# EAGLE board axiom_beta_main_board_v0.27_test-default.8f82e889 (EAGLE 7.7.0), part 1 of 3
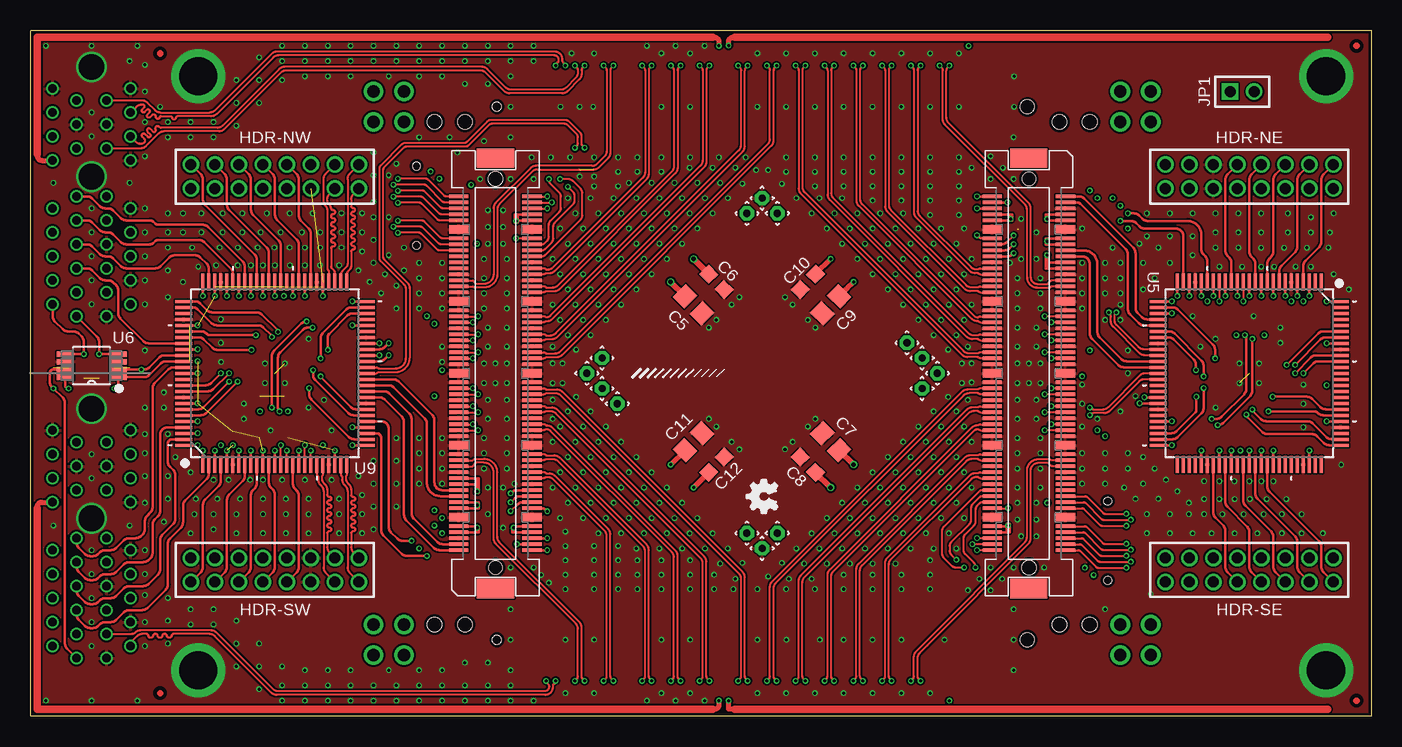
[diagram p0: board, top side]
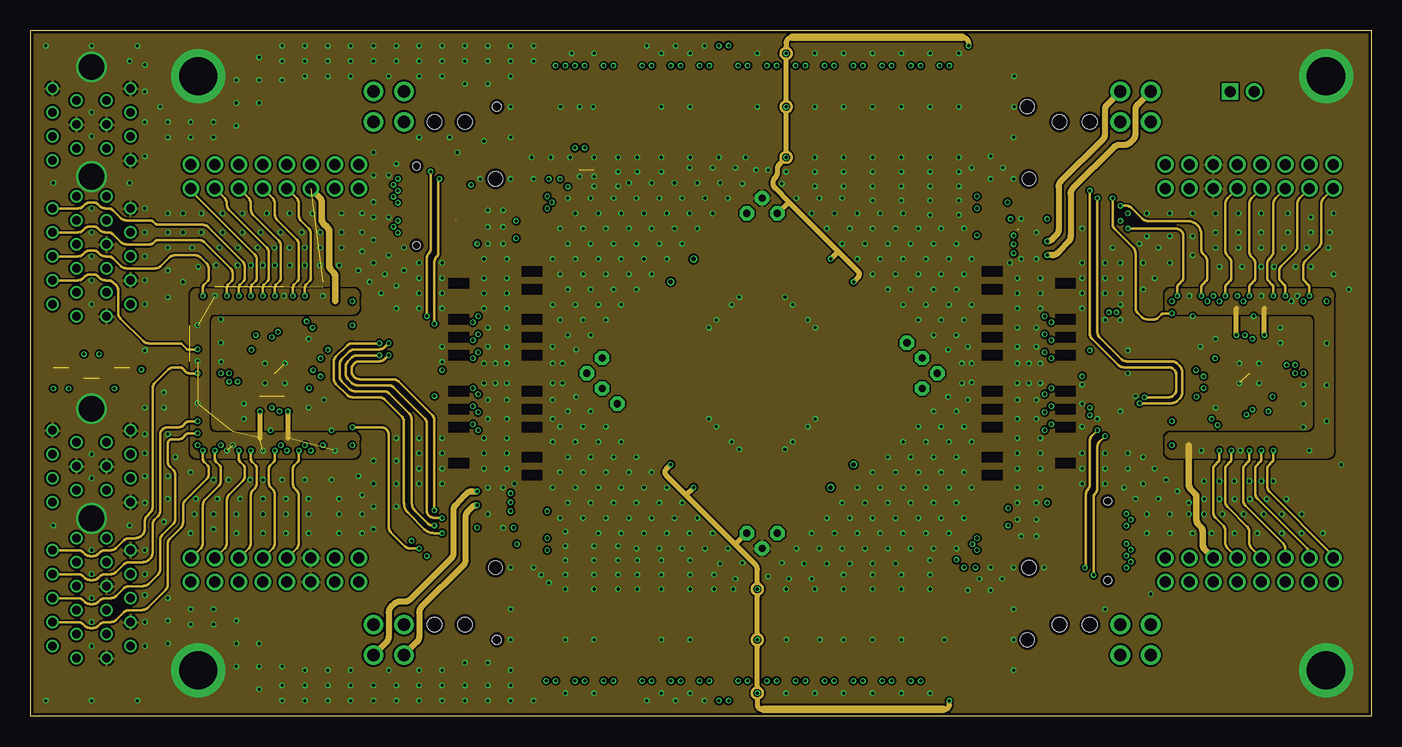
[diagram p1: board, inner layer Route2]
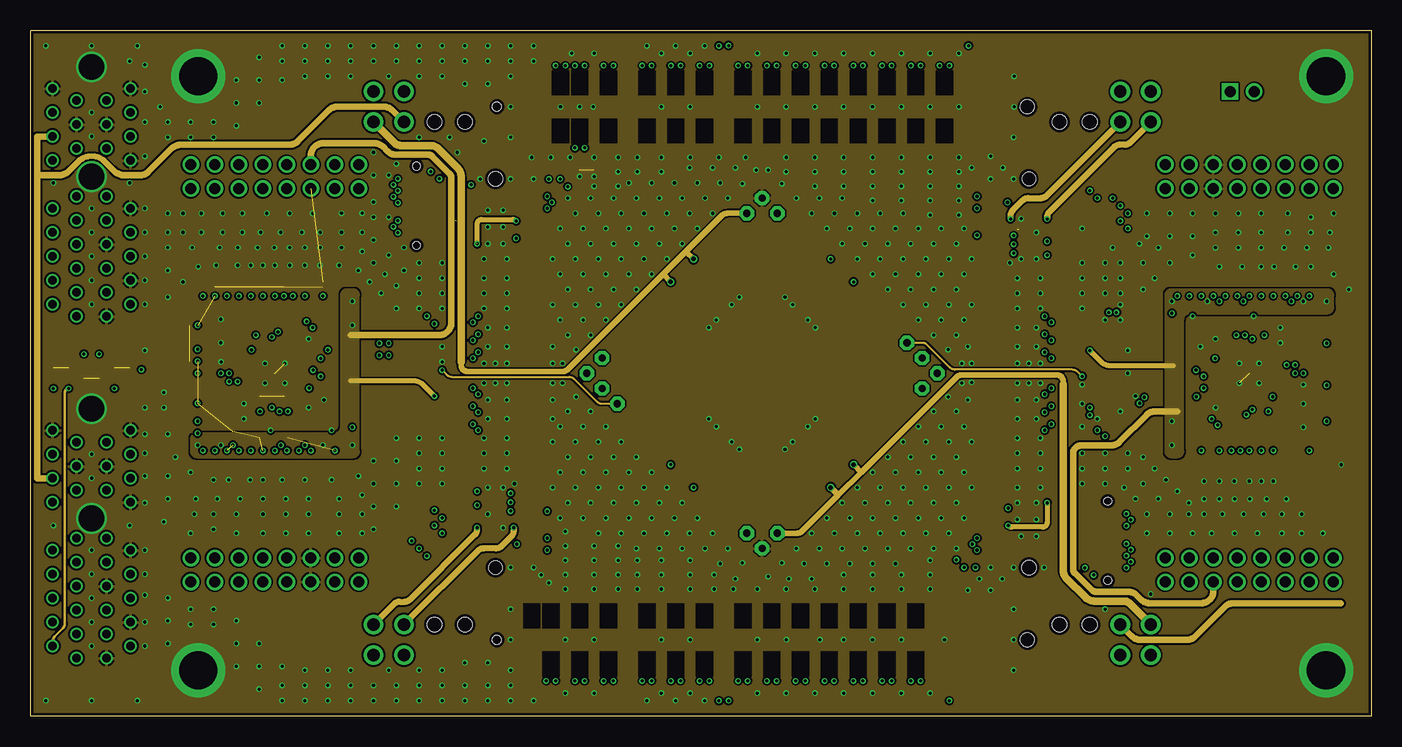
[diagram p2: board, inner layer Route15]
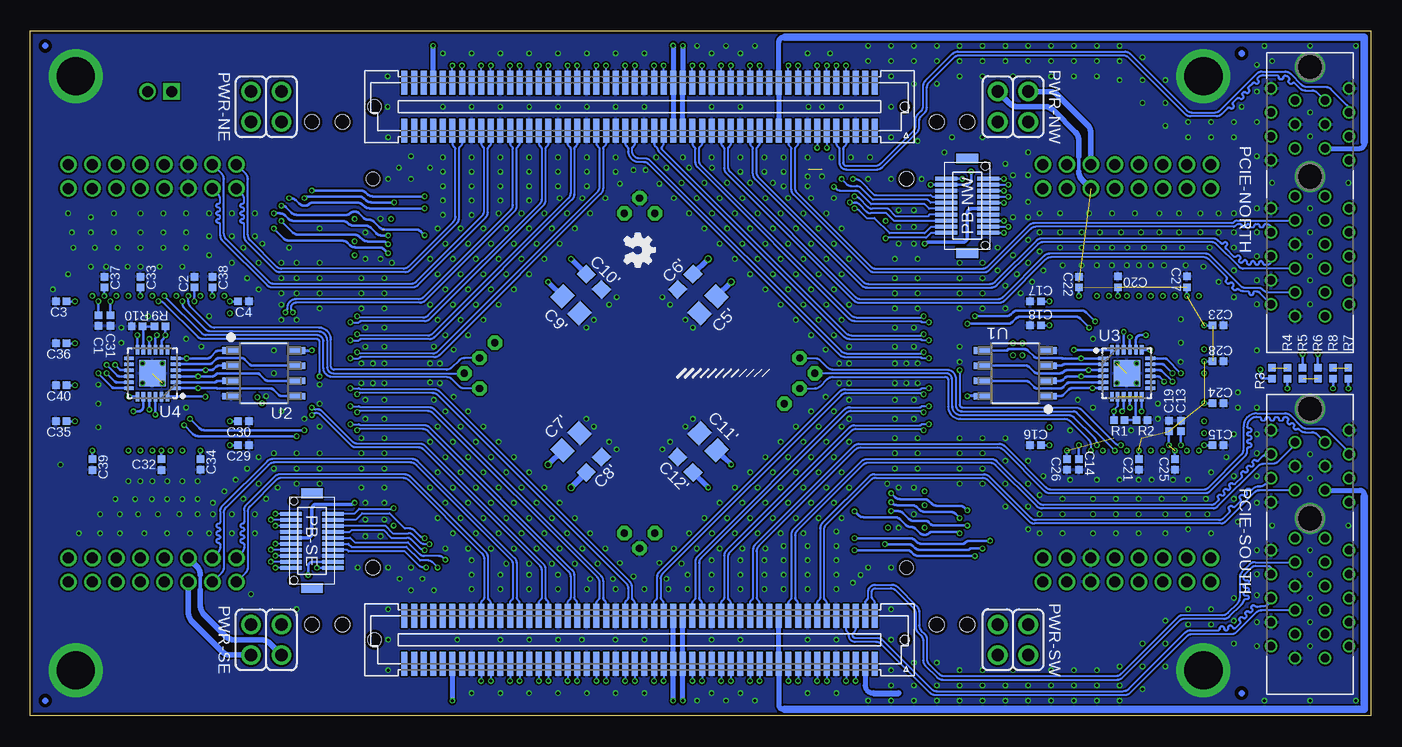
[diagram p3: board, bottom side, seen from below]

Size 111.76 x 57.15 mm. Coordinates in mm from the lower left corner, seen from the top.
Outline: 111.76,57.15 0,57.15 0,0 111.76,0 111.76,57.15
Copper layers (1*2*15*16): Top 0.035559375mm / dielectric 0.17018125mm / Route2 0.01778125mm / dielectric 47mil / Route15 0.01778125mm / dielectric 0.17018125mm / Bottom 0.035559375mm
Design rules "OSHPark-4layer-tuned *": minimum track width 5mil, minimum drill 10mil, track to track 6mil, track to pad 5mil, pad to pad 5mil, via to via 5mil, smd to smd 5mil, copper to edge 10mil, drill to drill 6mil, minimum pad ring 4mil, minimum via ring 4mil, stop-mask expansion 2mil, vias tented up to drill 100mil, thermal gap 6mil
Net classes: 0 default: width 0.152 mm, drill 0.254 mm; 1 power: width 0.152 mm, drill 0.254 mm
Holes 1.2 mm at 33.66,49.53 36.2,49.53 85.72,49.53 88.27,49.53 33.66,7.62 36.2,7.62 85.72,7.62 88.27,7.62
tKeepout: area 105.5,50.8 to 110.5,55.8; area 105.5,1.3 to 110.5,6.3; area 11.5,1.3 to 16.5,6.3; area 11.5,50.8 to 16.5,55.8; area 44.8,12.4 to 77.1,44.7
bKeepout: area 105.5,50.8 to 110.5,55.8; area 105.5,1.3 to 110.5,6.3; area 11.5,1.3 to 16.5,6.3; area 11.5,50.8 to 16.5,55.8
tRestrict: area 10.2,1.3 to 11.4,2.5; area 10.2,54.7 to 11.4,55.8; area 109.9,0.7 to 111,1.8; area 109.9,55.3 to 111,56.4
bRestrict: area 10.2,1.3 to 11.4,2.5; area 10.2,54.7 to 11.4,55.8; area 109.9,0.7 to 111,1.8; area 109.9,55.3 to 111,56.4

## Footprints (pad centres in the part's own frame; a part is rotated, then mirrored left to right if it is on the bottom)
0402-B = smd 0.62 x 0.62: 1 -0.45,0; 2 0.45,0
0805-A = smd 1.35 x 1.55: 1 -1,0; 2 1,0
0603-A = smd 1.15 x 1.1: 1 -0.9,0; 2 0.9,0
2X08M = drill 0.914: 1 -7,-1; 2 -7,1; 3 -5,-1; 4 -5,1; 5 -3,-1; 6 -3,1; 7 -1,-1; 8 -1,1; 9 1,-1; 10 1,1; 11 3,-1; 12 3,1; 13 5,-1; 14 5,1; 15 7,-1; 16 7,1
1X02M = drill 0.914 square: 1 -1,0 | drill 0.914: 2 1,0
DF12(XX)-20DP-0.5V = smd 1.8 x 0.35: 1 -1.75,2.25; 2 1.75,2.25; 3 -1.75,1.75; 4 1.75,1.75; 5 -1.75,1.25; 6 1.75,1.25; 7 -1.75,0.75; 8 1.75,0.75; 9 -1.75,0.25; 10 1.75,0.25; 11 -1.75,-0.25; 12 1.75,-0.25; 13 -1.75,-0.75; 14 1.75,-0.75; 15 -1.75,-1.25; 16 1.75,-1.25; 17 -1.75,-1.75; 18 1.75,-1.75; 19 -1.75,-2.25; 20 1.75,-2.25 | smd 1.8 x 0.8: M1 0,3.95; M2 0,-3.95 | hole 0.625: 1.5,-3.3; 1.5,3.3
PCIE-36-NOPEG = drill 0.7: A1 -11.65,1.25; A2 -10.65,3.25; A3 -9.65,1.25; A4 -8.65,3.25; A5 -7.65,1.25; A6 -6.65,3.25; A7 -5.65,1.25; A8 -4.65,3.25; A9 -3.65,1.25; A10 -2.65,3.25; A11 -1.65,1.25; A12 1.35,3.25; A13 2.35,1.25; A14 3.35,3.25; A15 4.35,1.25; A16 5.35,3.25; A17 6.35,1.25; A18 7.35,3.25; B1 -11.65,-1.25; B2 -10.65,-3.25; B3 -9.65,-1.25; B4 -8.65,-3.25; B5 -7.65,-1.25; B6 -6.65,-3.25; B7 -5.65,-1.25; B8 -4.65,-3.25; B9 -3.65,-1.25; B10 -2.65,-3.25; B11 -1.65,-1.25; B12 1.35,-3.25; B13 2.35,-1.25; B14 3.35,-3.25; B15 4.35,-1.25; B16 5.35,-3.25; B17 6.35,-1.25; B18 7.35,-3.25
2X02 = drill 1.016 pad 1.651: 1 -1.27,-1.27; 2 -1.27,1.27; 3 1.27,-1.27; 4 1.27,1.27
SOIC127P600X175-8N = smd 1.473 x 0.559: 1 -2.718,1.905; 2 -2.718,0.635; 3 -2.718,-0.635; 4 -2.718,-1.905; 5 2.718,-1.905; 6 2.718,-0.635; 7 2.718,0.635; 8 2.718,1.905
QFN50P400X400X80-25N = smd 0.813 x 0.305: 1 -1.956,1.245; 2 -1.956,0.762; 3 -1.956,0.254; 4 -1.956,-0.254; 5 -1.956,-0.762; 6 -1.956,-1.245; 13 1.956,-1.245; 14 1.956,-0.762; 15 1.956,-0.254; 16 1.956,0.254; 17 1.956,0.762; 18 1.956,1.245 | smd 0.305 x 0.813: 7 -1.245,-1.956; 8 -0.762,-1.956; 9 -0.254,-1.956; 10 0.254,-1.956; 11 0.762,-1.956; 12 1.245,-1.956; 19 1.245,1.956; 20 0.762,1.956; 21 0.254,1.956; 22 -0.254,1.956; 23 -0.762,1.956; 24 -1.245,1.956 | smd 2.21 x 2.21: 25 0,0
MACHXO2-100TQFP = smd 1.4 x 0.25: 1 -7.6,6; 2 -7.6,5.5; 3 -7.6,5; 4 -7.6,4.5; 5 -7.6,4; 6 -7.6,3.5; 7 -7.6,3; 8 -7.6,2.5; 9 -7.6,2; 10 -7.6,1.5; 11 -7.6,1; 12 -7.6,0.5; 13 -7.6,0; 14 -7.6,-0.5; 15 -7.6,-1; 16 -7.6,-1.5; 17 -7.6,-2; 18 -7.6,-2.5; 19 -7.6,-3; 20 -7.6,-3.5; 21 -7.6,-4; 22 -7.6,-4.5; 23 -7.6,-5; 24 -7.6,-5.5; 25 -7.6,-6; 51 7.6,-6; 52 7.6,-5.5; 53 7.6,-5; 54 7.6,-4.5; 55 7.6,-4; 56 7.6,-3.5; 57 7.6,-3; 58 7.6,-2.5; 59 7.6,-2; 60 7.6,-1.5; 61 7.6,-1; 62 7.6,-0.5; 63 7.6,0; 64 7.6,0.5; 65 7.6,1; 66 7.6,1.5; 67 7.6,2; 68 7.6,2.5; 69 7.6,3; 70 7.6,3.5; 71 7.6,4; 72 7.6,4.5; 73 7.6,5; 74 7.6,5.5; 75 7.6,6 | smd 0.25 x 1.4: 26 -6,-7.6; 27 -5.5,-7.6; 28 -5,-7.6; 29 -4.5,-7.6; 30 -4,-7.6; 31 -3.5,-7.6; 32 -3,-7.6; 33 -2.5,-7.6; 34 -2,-7.6; 35 -1.5,-7.6; 36 -1,-7.6; 37 -0.5,-7.6; 38 0,-7.6; 39 0.5,-7.6; 40 1,-7.6; 41 1.5,-7.6; 42 2,-7.6; 43 2.5,-7.6; 44 3,-7.6; 45 3.5,-7.6; 46 4,-7.6; 47 4.5,-7.6; 48 5,-7.6; 49 5.5,-7.6; 50 6,-7.6; 76 6,7.6; 77 5.5,7.6; 78 5,7.6; 79 4.5,7.6; 80 4,7.6; 81 3.5,7.6; 82 3,7.6; 83 2.5,7.6; 84 2,7.6; 85 1.5,7.6; 86 1,7.6; 87 0.5,7.6; 88 0,7.6; 89 -0.5,7.6; 90 -1,7.6; 91 -1.5,7.6; 92 -2,7.6; 93 -2.5,7.6; 94 -3,7.6; 95 -3.5,7.6; 96 -4,7.6; 97 -4.5,7.6; 98 -5,7.6; 99 -5.5,7.6; 100 -6,7.6
SOP65P490X110-8N = smd 1.422 x 0.457: 1 -2.21,0.965; 2 -2.21,0.33; 3 -2.21,-0.33; 4 -2.21,-0.965; 5 2.21,-0.965; 6 2.21,-0.33; 7 2.21,0.33; 8 2.21,0.965
1.2/0.6 = drill 0.6 pad 1.2 octagon: 1 0,0
FX10A-100S/10 = smd 0.3 x 1.6: 1 -14.75,3.05; 2 -14.75,-3.05; 3 -14.25,3.05; 4 -14.25,-3.05; 5 -13.75,3.05; 6 -13.75,-3.05; 7 -13.25,3.05; 8 -13.25,-3.05; 9 -12.75,3.05; 10 -12.75,-3.05; 11 -11.25,3.05; 12 -11.25,-3.05; 13 -10.75,3.05; 14 -10.75,-3.05; 15 -10.25,3.05; 16 -10.25,-3.05; 17 -9.75,3.05; 18 -9.75,-3.05; 19 -9.25,3.05; 20 -9.25,-3.05; 21 -8.75,3.05; 22 -8.75,-3.05; 23 -8.25,3.05; 24 -8.25,-3.05; 25 -7.75,3.05; 26 -7.75,-3.05; 27 -7.25,3.05; 28 -7.25,-3.05; 29 -6.75,3.05; 30 -6.75,-3.05; 31 -5.25,3.05; 32 -5.25,-3.05; 33 -4.75,3.05; 34 -4.75,-3.05; 35 -4.25,3.05; 36 -4.25,-3.05; 37 -3.75,3.05; 38 -3.75,-3.05; 39 -3.25,3.05; 40 -3.25,-3.05; 41 -2.75,3.05; 42 -2.75,-3.05; 43 -2.25,3.05; 44 -2.25,-3.05; 45 -1.75,3.05; 46 -1.75,-3.05; 47 -1.25,3.05; 48 -1.25,-3.05; 49 -0.75,3.05; 50 -0.75,-3.05; 51 0.75,3.05; 52 0.75,-3.05; 53 1.25,3.05; 54 1.25,-3.05; 55 1.75,3.05; 56 1.75,-3.05; 57 2.25,3.05; 58 2.25,-3.05; 59 2.75,3.05; 60 2.75,-3.05; 61 3.25,3.05; 62 3.25,-3.05; 63 3.75,3.05; 64 3.75,-3.05; 65 4.25,3.05; 66 4.25,-3.05; 67 4.75,3.05; 68 4.75,-3.05; 69 5.25,3.05; 70 5.25,-3.05; 71 6.75,3.05; 72 6.75,-3.05; 73 7.25,3.05; 74 7.25,-3.05; 75 7.75,3.05; 76 7.75,-3.05; 77 8.25,3.05; 78 8.25,-3.05; 79 8.75,3.05; 80 8.75,-3.05; 81 9.25,3.05; 82 9.25,-3.05; 83 9.75,3.05; 84 9.75,-3.05; 85 10.25,3.05; 86 10.25,-3.05; 87 10.75,3.05; 88 10.75,-3.05; 89 11.25,3.05; 90 11.25,-3.05; 91 12.75,3.05; 92 12.75,-3.05; 93 13.25,3.05; 94 13.25,-3.05; 95 13.75,3.05; 96 13.75,-3.05; 97 14.25,3.05; 98 14.25,-3.05; 99 14.75,3.05; 100 14.75,-3.05 | smd 0.7 x 1.6: G1 -12,3.05; G2 -12,-3.05; G3 -6,3.05; G4 -6,-3.05; G5 0,3.05; G6 0,-3.05; G7 6,3.05; G8 6,-3.05; G9 12,3.05; G10 12,-3.05 | smd 1.6 x 3.1: M1 -17.95,0; M2 17.95,0 | hole 1.1: -16.2,0 | hole 1.2: 16.2,0
µZ-NOHOLES-R = smd 0.5 x 2: 1 19.6,-24.226; 2 19.6,-20.226; 3 18.8,-24.226; 4 18.8,-20.226; 5 18,-24.226; 6 18,-20.226; 7 17.2,-24.226; 8 17.2,-20.226; 9 16.4,-24.226; 10 16.4,-20.226; 11 15.6,-24.226; 12 15.6,-20.226; 13 14.8,-24.226; 14 14.8,-20.226; 15 14,-24.226; 16 14,-20.226; 17 13.2,-24.226; 18 13.2,-20.226; 19 12.4,-24.226; 20 12.4,-20.226; 21 11.6,-24.226; 22 11.6,-20.226; 23 10.8,-24.226; 24 10.8,-20.226; 25 10,-24.226; 26 10,-20.226; 27 9.2,-24.226; 28 9.2,-20.226; 29 8.4,-24.226; 30 8.4,-20.226; 31 7.6,-24.226; 32 7.6,-20.226; 33 6.8,-24.226; 34 6.8,-20.226; 35 6,-24.226; 36 6,-20.226; 37 5.2,-24.226; 38 5.2,-20.226; 39 4.4,-24.226; 40 4.4,-20.226; 41 3.6,-24.226; 42 3.6,-20.226; 43 2.8,-24.226; 44 2.8,-20.226; 45 2,-24.226; 46 2,-20.226; 47 1.2,-24.226; 48 1.2,-20.226; 49 0.4,-24.226; 50 0.4,-20.226; 51 -0.4,-24.226; 52 -0.4,-20.226; 53 -1.2,-24.226; 54 -1.2,-20.226; 55 -2,-24.226; 56 -2,-20.226; 57 -2.8,-24.226; 58 -2.8,-20.226; 59 -3.6,-24.226; 60 -3.6,-20.226; 61 -4.4,-24.226; 62 -4.4,-20.226; 63 -5.2,-24.226; 64 -5.2,-20.226; 65 -6,-24.226; 66 -6,-20.226; 67 -6.8,-24.226; 68 -6.8,-20.226; 69 -7.6,-24.226; 70 -7.6,-20.226; 71 -8.4,-24.226; 72 -8.4,-20.226; 73 -9.2,-24.226; 74 -9.2,-20.226; 75 -10,-24.226; 76 -10,-20.226; 77 -10.8,-24.226; 78 -10.8,-20.226; 79 -11.6,-24.226; 80 -11.6,-20.226; 81 -12.4,-24.226; 82 -12.4,-20.226; 83 -13.2,-24.226; 84 -13.2,-20.226; 85 -14,-24.226; 86 -14,-20.226; 87 -14.8,-24.226; 88 -14.8,-20.226; 89 -15.6,-24.226; 90 -15.6,-20.226; 91 -16.4,-24.226; 92 -16.4,-20.226; 93 -17.2,-24.226; 94 -17.2,-20.226; 95 -18,-24.226; 96 -18,-20.226; 97 -18.8,-24.226; 98 -18.8,-20.226; 99 -19.6,-24.226; 100 -19.6,-20.226; 101 19.6,20.226; 102 19.6,24.226; 103 18.8,20.226; 104 18.8,24.226; 105 18,20.226; 106 18,24.226; 107 17.2,20.226; 108 17.2,24.226; 109 16.4,20.226; 110 16.4,24.226; 111 15.6,20.226; 112 15.6,24.226; 113 14.8,20.226; 114 14.8,24.226; 115 14,20.226; 116 14,24.226; 117 13.2,20.226; 118 13.2,24.226; 119 12.4,20.226; 120 12.4,24.226; 121 11.6,20.226; 122 11.6,24.226; 123 10.8,20.226; 124 10.8,24.226; 125 10,20.226; 126 10,24.226; 127 9.2,20.226; 128 9.2,24.226; 129 8.4,20.226; 130 8.4,24.226; 131 7.6,20.226; 132 7.6,24.226; 133 6.8,20.226; 134 6.8,24.226; 135 6,20.226; 136 6,24.226; 137 5.2,20.226; 138 5.2,24.226; 139 4.4,20.226; 140 4.4,24.226; 141 3.6,20.226; 142 3.6,24.226; 143 2.8,20.226; 144 2.8,24.226; 145 2,20.226; 146 2,24.226; 147 1.2,20.226; 148 1.2,24.226; 149 0.4,20.226; 150 0.4,24.226; 151 -0.4,20.226; 152 -0.4,24.226; 153 -1.2,20.226; 154 -1.2,24.226; 155 -2,20.226; 156 -2,24.226; 157 -2.8,20.226; 158 -2.8,24.226; 159 -3.6,20.226; 160 -3.6,24.226; 161 -4.4,20.226; 162 -4.4,24.226; 163 -5.2,20.226; 164 -5.2,24.226; 165 -6,20.226; 166 -6,24.226; 167 -6.8,20.226; 168 -6.8,24.226; 169 -7.6,20.226; 170 -7.6,24.226; 171 -8.4,20.226; 172 -8.4,24.226; 173 -9.2,20.226; 174 -9.2,24.226; 175 -10,20.226; 176 -10,24.226; 177 -10.8,20.226; 178 -10.8,24.226; 179 -11.6,20.226; 180 -11.6,24.226; 181 -12.4,20.226; 182 -12.4,24.226; 183 -13.2,20.226; 184 -13.2,24.226; 185 -14,20.226; 186 -14,24.226; 187 -14.8,20.226; 188 -14.8,24.226; 189 -15.6,20.226; 190 -15.6,24.226; 191 -16.4,20.226; 192 -16.4,24.226; 193 -17.2,20.226; 194 -17.2,24.226; 195 -18,20.226; 196 -18,24.226; 197 -18.8,20.226; 198 -18.8,24.226; 199 -19.6,20.226; 200 -19.6,24.226 | hole 1.125: 22.1,-22.225; 22.1,22.225 | hole 0.725: -22.1,-22.225; -22.1,22.225

## Placement (x,y rotation side)
C1  100n  [0402-B]  106.06,32.98 270 bottom
C2  100n  [0402-B]  98.06,36.17 90 bottom
C3  10n  [0402-B]  109.16,34.58 180 bottom
C4  10n  [0402-B]  93.96,34.58 0 bottom
C5  [0805-A]  55.25,34.29 315 top
C5'  [0805-A]  55.25,34.29 225 bottom
C6  [0603-A]  57.15,36.2 315 top
C6'  [0603-A]  57.15,36.2 225 bottom
C7  [0805-A]  66.67,22.86 135 top
C7'  [0805-A]  66.67,22.86 45 bottom
C8  [0603-A]  64.77,20.95 135 top
C8'  [0603-A]  64.77,20.95 45 bottom
C9  [0805-A]  66.67,34.29 225 top
C9'  [0805-A]  66.67,34.29 315 bottom
C10  [0603-A]  64.77,36.2 225 top
C10'  [0603-A]  64.77,36.2 315 bottom
C11  [0805-A]  55.25,22.86 45 top
C11'  [0805-A]  55.25,22.86 135 bottom
C12  [0603-A]  57.15,20.95 45 top
C12'  [0603-A]  57.15,20.95 135 bottom
C13  100n  [0402-B]  15.86,24.17 90 bottom
C14  100n  [0402-B]  24.36,20.98 270 bottom
C15  10n  [0402-B]  12.76,22.57 0 bottom
C16  10n  [0402-B]  27.96,22.57 180 bottom
C17  10n  [0402-B]  27.96,34.58 180 bottom
C18  10n  [0402-B]  27.96,32.58 180 bottom
C19  100n  [0402-B]  16.86,24.17 90 bottom
C20  100n  [0402-B]  21.11,36.2 90 bottom
C21  10n  [0402-B]  19.36,20.98 270 bottom
C22  10n  [0402-B]  24.36,36.18 90 bottom
C23  10n  [0402-B]  12.76,32.58 0 bottom
C24  10n  [0402-B]  12.76,26.07 0 bottom
C25  10n  [0402-B]  16.36,20.98 270 bottom
C26  10n  [0402-B]  25.36,20.98 270 bottom
C27  10n  [0402-B]  15.36,36.2 90 bottom
C28  100n  [0402-B]  12.76,29.57 0 bottom
C29  10n  [0402-B]  93.96,22.57 0 bottom
C30  10n  [0402-B]  93.96,24.57 0 bottom
C31  100n  [0402-B]  105.06,32.98 270 bottom
C32  100n  [0402-B]  100.81,20.95 270 bottom
C33  10n  [0402-B]  102.56,36.17 90 bottom
C34  10n  [0402-B]  97.56,20.97 270 bottom
C35  10n  [0402-B]  109.16,24.57 180 bottom
C36  10n  [0402-B]  109.16,31.07 180 bottom
C37  10n  [0402-B]  105.56,36.17 90 bottom
C38  10n  [0402-B]  96.56,36.17 90 bottom
C39  10n  [0402-B]  106.56,20.95 270 bottom
C40  100n  [0402-B]  109.16,27.57 180 bottom
HDR-NE  [2X08M]  101.56,44.97 180 top
HDR-NW  [2X08M]  20.36,44.97 0 top
HDR-SE  [2X08M]  101.56,12.18 180 top
HDR-SW  [2X08M]  20.36,12.18 0 top
JP1  [1X02M]  100.97,52.07 0 top
LOGO1  OSHW_LOGO_FILLX0100-NT  [OSHW_FILLX100_NOTEXT]  62.23,16.89 90 top
LOGO2  OSHW_LOGO_FILLX0100-NT  [OSHW_FILLX100_NOTEXT]  62.23,40.26 270 bottom
PB-NW  DF12(XX)-20DP-0.5V  [DF12(XX)-20DP-0.5V]  33.66,42.55 0 bottom
PB-SE  DF12(XX)-20DP-0.5V  [DF12(XX)-20DP-0.5V]  88.27,14.6 180 bottom
PCIE-NORTH  PCIE-36-AXIOM-NOPEG  [PCIE-36-NOPEG]  5.08,44.97 90 bottom
PCIE-SOUTH  PCIE-36-AXIOM-NOPEG  [PCIE-36-NOPEG]  5.08,16.48 90 bottom
PWR-NE  PINHD-2X02_2.54  [2X02]  92.08,50.8 180 bottom
PWR-NW  PINHD-2X02_2.54  [2X02]  29.85,50.8 0 bottom
PWR-SE  PINHD-2X02_2.54  [2X02]  92.08,6.35 180 bottom
PWR-SW  PINHD-2X02_2.54  [2X02]  29.85,6.35 0 bottom
R1  [0402-B]  20.99,24.66 0 bottom
R2  [0402-B]  19.09,24.66 0 bottom
R3  [0402-B]  8.26,28.57 270 bottom
R4  [0402-B]  6.98,28.57 270 bottom
R5  [0402-B]  5.72,28.57 90 bottom
R6  [0402-B]  4.45,28.57 90 bottom
R7  [0402-B]  1.91,28.57 270 bottom
R8  [0402-B]  3.18,28.57 270 bottom
R9  [0402-B]  100.93,32.49 180 bottom
R10  [0402-B]  102.83,32.49 180 bottom
U1  SST25VF020B  [SOIC127P600X175-8N]  29.65,28.57 180 bottom
U2  SST25VF020B  [SOIC127P600X175-8N]  92.27,28.57 0 bottom
U3  [QFN50P400X400X80-25N]  20.36,28.57 0 bottom
U4  [QFN50P400X400X80-25N]  101.56,28.57 180 bottom
U5  MACHXO2-100  [MACHXO2-100TQFP]  101.56,28.57 270 top
U6  PCA9540BDP  [SOP65P490X110-8N]  5.08,29.21 180 top
U9  MACHXO2-100  [MACHXO2-100TQFP]  20.36,28.57 90 top
U$1  PINPAD1.27MM  [1.2/0.6]  46.36,28.57 45 top
U$2  PINPAD1.27MM  [1.2/0.6]  47.62,27.3 45 top
U$3  PINPAD1.27MM  [1.2/0.6]  73.03,31.11 45 top
U$4  PINPAD1.27MM  [1.2/0.6]  48.9,26.04 225 top
U$11  PINPAD1.27MM  [1.2/0.6]  47.62,29.84 45 top
U$14  PINPAD1.27MM  [1.2/0.6]  75.56,28.57 45 top
U$15  PINPAD1.27MM  [1.2/0.6]  74.3,29.84 45 top
U$16  PINPAD1.27MM  [1.2/0.6]  74.3,27.3 45 top
U$17  PINPAD1.27MM  [1.2/0.6]  60.96,43.18 45 top
U$18  PINPAD1.27MM  [1.2/0.6]  59.69,41.91 45 top
U$19  PINPAD1.27MM  [1.2/0.6]  62.23,41.91 45 top
U$20  PINPAD1.27MM  [1.2/0.6]  60.96,13.97 45 top
U$21  PINPAD1.27MM  [1.2/0.6]  62.23,15.24 45 top
U$22  PINPAD1.27MM  [1.2/0.6]  59.69,15.24 45 top
X-EAST  FX10-100/10S  [FX10A-100S/10]  83.19,28.57 270 top
X-WEST  FX10-100/10S  [FX10A-100S/10]  38.73,28.57 90 top
ZED1  µZ-FCI-NOHOLES-R  [µZ-NOHOLES-R]  60.96,28.57 180 bottom

## Library data of the parts
C1-C5 C5' C6 C6' C7 C7' C8 C8' C9 C9' C10 C10' C11 C11' C12 C12' C13-C40 R1-R10 = generic-rcl
HDR-NE HDR-NW HDR-SE HDR-SW PWR-NE PWR-NW PWR-SE PWR-SW = pincon
JP1 = pinhead-2
LOGO1 LOGO2 = ohw-logo
PB-NW PB-SE = df12
PCIE-NORTH PCIE-SOUTH = PCIe
U1 U2 = flash
U3 U4 = microchip-exp
U5 U9 = machxo2
U6 = pca9540; MPN: PCA9540BDP; OC_FARNELL: 2212116; OC_NEWARK: 55W4318; PACKAGE: TSSOP8; SUPPLIER: NXP
U$1-U$4 U$11 U$14-U$22 = pinpad
X-EAST X-WEST = fx10
ZED1 = microzed

## Nets
!HOLD!_E: U2.7 U4.5
!HOLD!_W: U1.7 U3.5
!WP!_E: U2.3 U4.2
!WP!_W: U1.3 U3.2
A_SCL: PB-NW.1 U3.9
A_SDA: PB-NW.3 U3.10
B_SCL: PB-SE.1 U4.9
B_SDA: PB-SE.3 U4.10
BANK13_00_N [power]: PCIE-NORTH.A14 ZED1.89
BANK13_00_P [power]: PCIE-NORTH.A13 ZED1.87
BANK13_01_N [power]: U9.38 ZED1.90
BANK13_01_P [power]: U9.39 ZED1.88
BANK13_02_N [power]: PCIE-NORTH.A16 ZED1.93
BANK13_02_P [power]: PCIE-NORTH.A17 ZED1.91
BANK13_03_N [power]: PCIE-NORTH.B16 ZED1.94
BANK13_03_P [power]: PCIE-NORTH.B17 ZED1.92
BANK13_04_N [power]: PCIE-SOUTH.A6 ZED1.195
BANK13_04_P [power]: PCIE-SOUTH.A5 ZED1.193
BANK13_05_N: PCIE-SOUTH.A3 ZED1.196
BANK13_05_P: PCIE-SOUTH.A2 ZED1.194
BANK13_06_N [power]: PCIE-SOUTH.A8 ZED1.199
BANK13_06_P [power]: PCIE-SOUTH.A9 ZED1.197
C_CK_E: U5.18 U$14.1
C_CK_W: U9.18 U$1.1
C_EN_E: U5.14 U$3.1
C_EN_W: U9.14 U$4.1
C_SI_E: U5.19 U$15.1
C_SI_W: U9.19 U$2.1
C_SO_E: U5.15 U$16.1
C_SO_W: U9.15 U$11.1
CSO_N_V [power]: C9'.1 C9.1 C10'.1 C10.1 U$19.1 ZED1.7
CSO_S_V [power]: C11'.1 C11.1 C12'.1 C12.1 U$22.1 ZED1.112
DONE_E: U4.22 U5.76
DONE_W: U3.22 U9.76
E_EN: U5.20 X-EAST.14
E_I2C_V: PWR-NE.1 X-EAST.11 X-EAST.13
E_SCK: U5.21 X-EAST.12
E_SCL: U5.36 X-EAST.15
E_SDA: U5.37 X-EAST.17
E_SDI: U5.24 X-EAST.16
E_SDO: U5.25 X-EAST.18
E_SPI_V: PWR-NE.3 X-EAST.19 X-EAST.21
E_VE_CV: PB-SE.19 X-EAST.90
E_VE_OV: PB-SE.8 X-EAST.93
E_VE_UV: PB-SE.10 X-EAST.91
GND: C1.2 C2.2 C3.2 C4.2 C5'.2 C5.2 C6'.2 C6.2 C7'.2 C7.2 C8'.2 C8.2 C9'.2 C9.2 C10'.2 C10.2 C11'.2 C11.2 C12'.2 C12.2 C13.2 C14.2 C15.2 C16.2 C17.2 C18.2 C19.2 C20.2 C21.2 C22.2 C23.2 C24.2 C25.2 C26.2 C27.2 C28.2 C29.2 C30.2 C31.2 C32.2 C33.2 C34.2 C35.2 C36.2 C37.2 C38.2 C39.2 C40.2 HDR-NE.11 HDR-NE.12 HDR-SW.11 HDR-SW.12 PB-NW.5 PB-NW.14 PB-SE.5 PB-SE.14 PCIE-NORTH.A1 PCIE-NORTH.A4 PCIE-NORTH.A7 PCIE-NORTH.A10 PCIE-NORTH.A12 PCIE-NORTH.A15 PCIE-NORTH.A18 PCIE-NORTH.B15 PCIE-NORTH.B18 PCIE-SOUTH.A1 PCIE-SOUTH.A4 PCIE-SOUTH.A7 PCIE-SOUTH.A10 PCIE-SOUTH.A12 PCIE-SOUTH.A15 PCIE-SOUTH.A18 PCIE-SOUTH.B15 PCIE-SOUTH.B18 R2.2 R10.2 U1.4 U2.4 U3.23 U3.25 U4.23 U4.25 U5.6 U5.22 U5.33 U5.44 U5.56 U5.72 U5.79 U5.92 U6.6 U9.6 U9.22 U9.33 U9.44 U9.56 U9.72 U9.79 U9.92 U$17.1 U$20.1 X-EAST.5 X-EAST.20 X-EAST.23 X-EAST.26 X-EAST.29 X-EAST.31 X-EAST.32 X-EAST.37 X-EAST.38 X-EAST.43 X-EAST.44 X-EAST.49 X-EAST.50 X-EAST.51 X-EAST.52 X-EAST.57 X-EAST.58 X-EAST.63 X-EAST.64 X-EAST.69 X-EAST.70 X-EAST.71 X-EAST.76 X-EAST.77 X-EAST.82 X-EAST.G1 X-EAST.G2 X-EAST.G3 X-EAST.G4 X-EAST.G5 X-EAST.G6 X-EAST.G7 X-EAST.G8 X-EAST.G9 X-EAST.G10 X-WEST.5 X-WEST.20 X-WEST.23 X-WEST.26 X-WEST.29 X-WEST.31 X-WEST.32 X-WEST.37 X-WEST.38 X-WEST.43 X-WEST.44 X-WEST.49 X-WEST.50 X-WEST.51 X-WEST.52 X-WEST.57 X-WEST.58 X-WEST.63 X-WEST.64 X-WEST.69 X-WEST.70 X-WEST.71 X-WEST.76 X-WEST.77 X-WEST.82 X-WEST.G1 X-WEST.G2 X-WEST.G3 X-WEST.G4 X-WEST.G5 X-WEST.G6 X-WEST.G7 X-WEST.G8 X-WEST.G9 X-WEST.G10 ZED1.15 ZED1.16 ZED1.21 ZED1.22 ZED1.27 ZED1.28 ZED1.33 ZED1.34 ZED1.39 ZED1.40 ZED1.45 ZED1.46 ZED1.51 ZED1.52 ZED1.65 ZED1.66 ZED1.71 ZED1.72 ZED1.77 ZED1.85 ZED1.86 ZED1.95 ZED1.96 ZED1.115 ZED1.116 ZED1.121 ZED1.122 ZED1.127 ZED1.128 ZED1.133 ZED1.134 ZED1.139 ZED1.140 ZED1.145 ZED1.146 ZED1.151 ZED1.152 ZED1.165 ZED1.166 ZED1.171 ZED1.172 ZED1.177 ZED1.185 ZED1.186 ZED1.191 ZED1.192
INITN_E: U4.21 U5.77
INITN_W: U3.21 U9.77
IO0: U5.84
IO1: U5.83
IO2: U5.75
IO3: U5.74
IO4: U5.71
IO5: U5.70
IO6: U5.69
IO7: U5.68
IO_SCL: U5.86
IO_SDA: U5.85
JTAG_V: PWR-SW.3 X-WEST.19 X-WEST.21
JTAGENB_E: U4.19 U5.82
JTAGENB_W: U3.19 U9.82
JX1_00_N [power]: X-EAST.27 ZED1.13
JX1_00_P [power]: X-EAST.25 ZED1.11
JX1_01_N [power]: HDR-NE.16 ZED1.14
JX1_01_P [power]: HDR-NE.15 ZED1.12
JX1_02_N [power]: X-EAST.24 ZED1.19
JX1_02_P [power]: X-EAST.22 ZED1.17
JX1_03_N [power]: HDR-NE.14 ZED1.20
JX1_03_P [power]: HDR-NE.13 ZED1.18
JX1_04_N [power]: X-EAST.30 ZED1.25
JX1_04_P [power]: X-EAST.28 ZED1.23
JX1_05_N: U5.35 ZED1.26
JX1_05_P: U5.34 ZED1.24
JX1_06_N [power]: X-EAST.36 ZED1.31
JX1_06_P [power]: X-EAST.34 ZED1.29
JX1_07_N [power]: X-EAST.35 ZED1.32
JX1_07_P [power]: X-EAST.33 ZED1.30
JX1_08_N: X-EAST.42 ZED1.37
JX1_08_P: X-EAST.40 ZED1.35
JX1_09_N [power]: X-EAST.41 ZED1.38
JX1_09_P [power]: X-EAST.39 ZED1.36
JX1_10_N [power]: X-EAST.48 ZED1.43
JX1_10_P [power]: X-EAST.46 ZED1.41
JX1_11_N [power]: X-EAST.47 ZED1.44
JX1_11_P [power]: X-EAST.45 ZED1.42
JX1_12_N [power]: X-WEST.56 ZED1.49
JX1_12_P [power]: X-WEST.54 ZED1.47
JX1_13_N [power]: X-WEST.55 ZED1.50
JX1_13_P [power]: X-WEST.53 ZED1.48
JX1_14_N [power]: X-WEST.62 ZED1.55
JX1_14_P [power]: X-WEST.60 ZED1.53
JX1_15_N: X-WEST.61 ZED1.56
JX1_15_P: X-WEST.59 ZED1.54
JX1_16_N [power]: X-WEST.68 ZED1.63
JX1_16_P [power]: X-WEST.66 ZED1.61
JX1_17_N [power]: X-WEST.67 ZED1.64
JX1_17_P [power]: X-WEST.65 ZED1.62
JX1_18_N [power]: X-WEST.74 ZED1.69
JX1_18_P [power]: X-WEST.72 ZED1.67
JX1_19_N [power]: PCIE-NORTH.A3 ZED1.70
JX1_19_P [power]: PCIE-NORTH.A2 ZED1.68
JX1_20_N: X-WEST.80 ZED1.75
JX1_20_P: X-WEST.78 ZED1.73
JX1_21_N: PCIE-NORTH.A6 ZED1.76
JX1_21_P: PCIE-NORTH.A5 ZED1.74
JX1_22_N: X-WEST.75 ZED1.83
JX1_22_P: X-WEST.73 ZED1.81
JX1_23_N [power]: PCIE-NORTH.A9 ZED1.84
JX1_23_P [power]: PCIE-NORTH.A8 ZED1.82
JX2_00_N [power]: HDR-SE.15 ZED1.119
JX2_00_P [power]: HDR-SE.16 ZED1.117
JX2_01_N [power]: X-EAST.73 ZED1.120
JX2_01_P [power]: X-EAST.75 ZED1.118
JX2_02_N [power]: HDR-SE.13 ZED1.125
JX2_02_P [power]: HDR-SE.14 ZED1.123
JX2_03_N [power]: X-EAST.78 ZED1.126
JX2_03_P [power]: X-EAST.80 ZED1.124
JX2_04_N [power]: U5.38 ZED1.131
JX2_04_P [power]: U5.39 ZED1.129
JX2_05_N [power]: X-EAST.72 ZED1.132
JX2_05_P [power]: X-EAST.74 ZED1.130
JX2_06_N [power]: X-EAST.65 ZED1.137
JX2_06_P [power]: X-EAST.67 ZED1.135
JX2_07_N [power]: X-EAST.66 ZED1.138
JX2_07_P [power]: X-EAST.68 ZED1.136
JX2_08_N [power]: X-EAST.59 ZED1.143
JX2_08_P [power]: X-EAST.61 ZED1.141
JX2_09_N [power]: X-EAST.60 ZED1.144
JX2_09_P [power]: X-EAST.62 ZED1.142
JX2_10_N [power]: X-EAST.53 ZED1.149
JX2_10_P [power]: X-EAST.55 ZED1.147
JX2_11_N [power]: X-EAST.54 ZED1.150
JX2_11_P [power]: X-EAST.56 ZED1.148
JX2_12_N [power]: X-WEST.45 ZED1.155
JX2_12_P [power]: X-WEST.47 ZED1.153
JX2_13_N [power]: X-WEST.46 ZED1.156
JX2_13_P [power]: X-WEST.48 ZED1.154
JX2_14_N: X-WEST.39 ZED1.163
JX2_14_P: X-WEST.41 ZED1.161
JX2_15_N [power]: X-WEST.40 ZED1.164
JX2_15_P [power]: X-WEST.42 ZED1.162
JX2_16_N [power]: X-WEST.33 ZED1.169
JX2_16_P [power]: X-WEST.35 ZED1.167
JX2_17_N [power]: X-WEST.34 ZED1.170
JX2_17_P [power]: X-WEST.36 ZED1.168
JX2_18_N [power]: PCIE-SOUTH.B17 ZED1.175
JX2_18_P [power]: PCIE-SOUTH.B16 ZED1.173
JX2_19_N [power]: X-WEST.28 ZED1.176
JX2_19_P [power]: X-WEST.30 ZED1.174
JX2_20_N [power]: PCIE-SOUTH.A17 ZED1.183
JX2_20_P [power]: PCIE-SOUTH.A16 ZED1.181
JX2_21_N [power]: X-WEST.22 ZED1.184
JX2_21_P [power]: X-WEST.24 ZED1.182
JX2_22_N: PCIE-SOUTH.A13 ZED1.189
JX2_22_P: PCIE-SOUTH.A14 ZED1.187
JX2_23_N [power]: X-WEST.25 ZED1.190
JX2_23_P [power]: X-WEST.27 ZED1.188
M_V_NW: C5'.1 C5.1 C6'.1 C6.1 PWR-NW.3 U$18.1
M_V_SE: C7'.1 C7.1 C8'.1 C8.1 PWR-SE.3 U$21.1
N$1: ZED1.9
N$6: X-EAST.79
N$7: X-EAST.81
N$9: U9.47
N$11: X-EAST.83
N$46: ZED1.10
N$47: ZED1.113
N$48: ZED1.114
N$49: ZED1.200
N$50: ZED1.97
N$51: ZED1.99
N$52: ZED1.98
N$53: ZED1.100
N$54: X-WEST.79
N$61: X-WEST.81
N$86: X-WEST.83
N$87: PB-NW.9 X-WEST.84
N$88: PB-NW.11 X-WEST.86
N$97: PB-NW.7 X-WEST.88
N$98: PB-SE.9 X-EAST.84
N$99: PB-SE.11 X-EAST.86
N$100: PB-SE.7 X-EAST.88
N$107: R9.2 R10.1 U4.11
N$115: PWR-SE.1
N$116: U5.47
N$117: U9.45
N$166: U5.45
N$177: R3.1 R4.1
N$178: R5.1 R6.1
N$179: R7.1 R8.1
N$180: U6.3
N$196: U3.7
N$200: R1.2 R2.1 U3.11
N$209: PCIE-SOUTH.A11
N$212: PCIE-NORTH.B3
N$245: PCIE-SOUTH.B3
N$256: PCIE-NORTH.A11
N_CHK_V: PB-NW.12 X-WEST.92 X-WEST.94
N_I2C_V: PWR-NE.4 X-EAST.7 X-EAST.9
N_SCK: U5.42 X-EAST.2
N_SCL: U5.29 X-EAST.1
N_SDA: U5.30 X-EAST.3
N_SDI: U5.28 X-EAST.6
N_SDO: U5.43 X-EAST.4
N_SPI_V: PWR-NE.2 X-EAST.8 X-EAST.10
N_VE_CV: PB-NW.13 X-WEST.100
N_VE_OV: PB-NW.2 X-WEST.99
N_VE_UV: PB-NW.16 X-WEST.89
N_VN_CV: PB-NW.15 X-WEST.98
N_VN_OV: PB-NW.4 X-WEST.97
N_VN_UV: PB-NW.18 X-WEST.87
N_VW_CV: PB-NW.17 X-WEST.96
N_VW_OV: PB-NW.6 X-WEST.95
N_VW_UV: PB-NW.20 X-WEST.85
PCIE_N_5V: PCIE-NORTH.B12 ZED1.59 ZED1.60
PCIE_N_IO0: PCIE-NORTH.B4 U9.84
PCIE_N_IO1: PCIE-NORTH.B5 U9.83
PCIE_N_IO2: PCIE-NORTH.B6 U9.75
PCIE_N_IO3: PCIE-NORTH.B7 U9.74
PCIE_N_IO4: PCIE-NORTH.B8 U9.71
PCIE_N_IO5: PCIE-NORTH.B9 U9.70
PCIE_N_IO6: PCIE-NORTH.B10 U9.69
PCIE_N_IO7: PCIE-NORTH.B11 U9.68
PCIE_N_SCL: PCIE-NORTH.B2 R6.2 U6.5
PCIE_N_SDA: PCIE-NORTH.B1 R5.2 U6.4
PCIE_N_V: PCIE-NORTH.B13 ZED1.79 ZED1.80
PCIE_S_5V: PCIE-SOUTH.B12 ZED1.159 ZED1.160
PCIE_S_IO0: PCIE-SOUTH.B4 U9.1
PCIE_S_IO1: PCIE-SOUTH.B5 U9.2
PCIE_S_IO2: PCIE-SOUTH.B6 U9.98
PCIE_S_IO3: PCIE-SOUTH.B7 U9.99
PCIE_S_IO4: PCIE-SOUTH.B8 U9.96
PCIE_S_IO5: PCIE-SOUTH.B9 U9.97
PCIE_S_IO6: PCIE-SOUTH.B10 U9.88
PCIE_S_IO7: PCIE-SOUTH.B11 U9.87
PCIE_S_SCL: PCIE-SOUTH.B2 R8.2 U6.8
PCIE_S_SDA: PCIE-SOUTH.B1 R7.2 U6.7
PCIE_S_V: PCIE-SOUTH.B13 ZED1.179 ZED1.180
PCIE_SCL: R4.2 U6.1 U9.86
PCIE_SDA: R3.2 U6.2 U9.85
PCIE_VCCIO: PCIE-NORTH.B14 PCIE-SOUTH.B14 PWR-NW.1
PEX_N_V [power]: ZED1.57 ZED1.58
PEX_S_V [power]: ZED1.157 ZED1.158
PROGRAMN_E: U4.20 U5.81
PROGRAMN_W: U3.20 U9.81
S_CHK_V: PB-SE.12 X-EAST.92 X-EAST.94
S_I2C_V: PWR-SW.4 X-WEST.7 X-WEST.9
S_IO0: U5.1
S_IO1: U5.2
S_IO2: U5.98
S_IO3: U5.99
S_IO4: U5.96
S_IO5: U5.97
S_IO6: U5.88
S_IO7: U5.87
S_SCK: U9.28 X-WEST.2
S_SCL: U9.34 X-WEST.1
S_SDA: U9.35 X-WEST.3
S_SDI: U9.30 X-WEST.6
S_SDO: U9.29 X-WEST.4
S_SPI_V: PWR-SW.2 X-WEST.8 X-WEST.10
S_VE_CV: PB-SE.17 X-EAST.96
S_VE_OV: PB-SE.6 X-EAST.95
S_VE_UV: PB-SE.20 X-EAST.85
S_VS_CV: PB-SE.15 X-EAST.98
S_VS_OV: PB-SE.4 X-EAST.97
S_VS_UV: PB-SE.18 X-EAST.87
S_VW_CV: PB-SE.13 X-EAST.100
S_VW_OV: PB-SE.2 X-EAST.99
S_VW_UV: PB-SE.16 X-EAST.89
SCK_E: U2.6 U4.3 U5.31
SCK_W: U1.6 U3.3 U9.31
SDI_E: U2.5 U4.1 U5.49
SDI_W: U1.5 U3.1 U9.49
SDO_E: U2.2 U4.4 U5.32
SDO_W: U1.2 U3.4 U9.32
SH_NE_IO0: HDR-NE.1 U5.4
SH_NE_IO1: HDR-NE.2 U5.3
SH_NE_IO2: HDR-NE.3 U5.8
SH_NE_IO3: HDR-NE.4 U5.7
SH_NE_IO4: HDR-NE.5 U5.10
SH_NE_IO5: HDR-NE.6 U5.9
SH_NE_IO6: HDR-NE.7 U5.12
SH_NE_IO7: HDR-NE.8 U5.13
SH_NE_IO8: HDR-NE.9 U5.16
SH_NE_IO9: HDR-NE.10 U5.17
SH_NW_IO0: HDR-NW.1 U9.67
SH_NW_IO1: HDR-NW.2 U9.66
SH_NW_IO2: HDR-NW.3 U9.65
SH_NW_IO3: HDR-NW.4 U9.64
SH_NW_IO4: HDR-NW.5 U9.63
SH_NW_IO5: HDR-NW.6 U9.62
SH_NW_IO6: HDR-NW.7 U9.60
SH_NW_IO7: HDR-NW.8 U9.59
SH_NW_IO8: HDR-NW.9 U9.58
SH_NW_IO9: HDR-NW.10 U9.57
SH_NW_V1: C13.1 C14.1 C15.1 C16.1 C17.1 C18.1 HDR-NW.12 PWR-NW.4 U1.8 U9.26 U9.46 U9.50 U9.100
SH_NW_V2: C19.1 C20.1 C21.1 C22.1 C23.1 C24.1 C25.1 C26.1 C27.1 C28.1 HDR-NW.11 PWR-NW.2 R1.1 U3.8 U3.12 U9.5 U9.11 U9.23 U9.55 U9.73 U9.80 U9.93
SH_SE_IO0: HDR-SE.1 U5.67
SH_SE_IO1: HDR-SE.2 U5.66
SH_SE_IO2: HDR-SE.3 U5.65
SH_SE_IO3: HDR-SE.4 U5.64
SH_SE_IO4: HDR-SE.5 U5.63
SH_SE_IO5: HDR-SE.6 U5.62
SH_SE_IO6: HDR-SE.7 U5.60
SH_SE_IO7: HDR-SE.8 U5.59
SH_SE_IO8: HDR-SE.9 U5.58
SH_SE_IO9: HDR-SE.10 U5.57
SH_SE_V1: C1.1 C2.1 C3.1 C4.1 C29.1 C30.1 HDR-SE.12 PWR-SE.4 U2.8 U5.26 U5.46 U5.50 U5.100
SH_SE_V2: C31.1 C32.1 C33.1 C34.1 C35.1 C36.1 C37.1 C38.1 C39.1 C40.1 HDR-SE.11 PWR-SE.2 R9.1 U4.8 U4.12 U5.5 U5.11 U5.23 U5.55 U5.73 U5.80 U5.93
SH_SW_IO0: HDR-SW.1 U9.4
SH_SW_IO1: HDR-SW.2 U9.3
SH_SW_IO2: HDR-SW.3 U9.8
SH_SW_IO3: HDR-SW.4 U9.7
SH_SW_IO4: HDR-SW.5 U9.10
SH_SW_IO5: HDR-SW.6 U9.9
SH_SW_IO6: HDR-SW.7 U9.12
SH_SW_IO7: HDR-SW.8 U9.13
SH_SW_IO8: HDR-SW.9 U9.16
SH_SW_IO9: HDR-SW.10 U9.17
SN_E: U4.24 U5.48
SN_W: U3.24 U9.48
SS_E: U2.1 U4.6 U5.27
SS_W: U1.1 U3.6 U9.27
TCK: U9.43 X-WEST.12
TCK_E: U4.17 U5.91
TCK_W: U3.17 U9.91
TDI: U9.41 X-WEST.16
TDI_E: U4.16 U5.94
TDI_W: U3.16 U9.94
TDO: U9.40 X-WEST.18
TDO_E: U4.15 U5.95
TDO_W: U3.15 U9.95
TMS: U9.42 X-WEST.14
TMS_E: U4.18 U5.90
TMS_W: U3.18 U9.90
VCCO_13 [power]: ZED1.198
VCCO_34: ZED1.78
VCCO_35: ZED1.178
W_I2C_V: PWR-SW.1 X-WEST.11 X-WEST.13
W_SCL: U9.36 X-WEST.15
W_SDA: U9.37 X-WEST.17
W_VW_CV: PB-NW.19 X-WEST.90
W_VW_OV: PB-NW.8 X-WEST.93
W_VW_UV: PB-NW.10 X-WEST.91
XX1_N: HDR-NW.16 U9.52
XX1_P: HDR-NW.15 U9.51
XX2_N: HDR-NW.14 U9.54
XX2_P: HDR-NW.13 U9.53
XX3_N: HDR-SW.16 U9.25
XX3_P: HDR-SW.15 U9.24
XX4_N: HDR-SW.14 U9.21
XX4_P: HDR-SW.13 U9.20
XY1_N: U5.52
XY1_P: U5.51
XY2_N: U5.54
XY2_P: U5.53

## Tracks (layer width: path | path; a pad name or v marks a point on that pad's centre or on a via)
!HOLD!_E
  Bottom 0.203: U2.7 93.19,29.21 arc45 93.46,29.32 93.87,29.73 arc-45 94.14,29.84 96,29.84 arc-45 96.27,29.73 96.56,29.45 arc45 96.83,29.34 U4.5
!HOLD!_W
  Bottom 0.203: U1.7 28.77,27.94 arc45 28.5,27.83 28.09,27.42 arc-45 27.82,27.3 25.91,27.3 arc-45 25.65,27.42 25.36,27.7 arc45 25.09,27.81 U3.5
!WP!_E
  Bottom 0.203: U2.3 96.09,27.94 arc-45 96.22,27.89 arc45 96.4,27.81 U4.2
!WP!_W
  Bottom 0.203: U1.3 25.83,29.21 arc-45 25.7,29.26 arc45 25.52,29.34 U3.2
A_SCL  (via drill 0.25)
  Top 0.203: v23.49,32.38 23.12,32.38 arc45 22.67,32.2 20.8,30.32 arc45 20.61,29.88 20.61,25.71 arc45 v20.74,25.4
  Route2 0.203: v34.07,44.8 arc45 33.97,44.55 33.97,38.6 arc-45 33.84,38.29 arc45 33.66,37.84 v33.66,32.7
  Bottom 0.203: U3.9 20.61,25.71 arc45 v20.74,25.4 | PB-NW.1 v34.07,44.8 | v33.66,32.7 30.3,32.7 arc-45 29.85,32.89 29.6,33.14 arc45 29.15,33.33 24.7,33.33 arc45 24.25,33.14 v23.49,32.38
A_SDA  (via drill 0.25)
  Top 0.203: v23,32.89 arc45 22.55,32.71 20.29,30.45 arc45 20.11,30 v20.11,25.72
  Route2 0.203: v33.34,45.4 33.34,38.92 arc-45 33.21,38.6 arc45 33.02,38.15 v33.02,33.34
  Bottom 0.203: U3.10 v20.11,25.72 | v36.7,44.3 PB-NW.3 33.72,44.3 arc-90 33.34,44.68 v33.34,45.4 | v33.02,33.34 30.43,33.34 arc-45 29.98,33.52 29.86,33.64 arc45 29.41,33.83 24.19,33.83 arc45 23.74,33.64 v23,32.89
B_SCL  (via drill 0.25)
  Top 0.203: v98.43,24.77 98.8,24.77 arc45 99.25,24.95 101.12,26.82 arc45 101.31,27.27 101.31,31.44 arc45 v101.18,31.75
  Route2 0.203: v87.85,12.36 arc45 87.95,12.59 87.95,18.55 arc-45 88.08,18.86 arc45 88.27,19.31 88.27,22.93 arc-45 88.45,23.38 v88.9,23.82
  Bottom 0.203: U4.9 101.31,31.44 arc45 v101.18,31.75 | PB-SE.1 v87.85,12.36 | v88.9,23.82 97.22,23.82 arc45 97.67,24.01 v98.43,24.77
B_SDA  (via drill 0.25)
  Top 0.203: v98.92,24.26 arc45 99.37,24.44 101.63,26.7 arc45 101.81,27.15 v101.81,31.43
  Route2 0.203: v88.58,11.75 88.58,18.23 arc-45 88.71,18.55 arc45 88.9,19 88.9,22.23 88.9,22.43 arc-45 89.09,22.88 v89.53,23.32
  Bottom 0.203: U4.10 v101.81,31.43 | PB-SE.3 88.2,12.85 arc-90 88.58,12.47 v88.58,11.75 | v89.53,23.32 97.73,23.32 arc45 98.18,23.51 v98.92,24.26
BANK13_00_N  (via drill 0.25)
  Top 0.152: v45.36,54.23 45.5,54.09 arc-45 45.61,53.82 45.61,53.66 arc-45 45.42,53.21 44.62,52.41 arc-45 44.17,52.22 40.04,52.22 arc-45 39.59,52.41 38.06,53.94 arc45 37.61,54.13 21.16,54.13 arc45 20.71,53.94 16.01,49.23 arc-45 15.56,49.05 10.85,49.05 arc-45 10.73,49.12 | PCIE-NORTH.A14 8.71,47.94 arc90 9.46,47.79 arc90 9.46,48.14 9.3,48.3 arc-90 9.3,48.51 9.3,48.52 arc-90 9.52,48.52 9.74,48.29 arc90 9.96,48.29 9.96,48.3 arc90 9.96,48.51 9.74,48.74 arc-90 9.74,48.95 9.74,48.96 arc-90 9.96,48.96 10.17,48.74 arc83 10.38,48.73 arc76 10.41,48.92 arc-35 10.39,49 arc-90 10.55,49.17 10.59,49.17 arc-45 10.73,49.12 | 10.73,49.12
  Bottom 0.152: ZED1.89 v45.36,54.23
BANK13_00_P  (via drill 0.25)
  Top 0.152: v46.16,54.23 46.02,54.09 arc45 45.91,53.82 45.91,53.53 arc-45 45.73,53.08 44.75,52.1 arc-45 44.3,51.92 39.92,51.92 arc-45 39.47,52.1 37.94,53.64 arc45 37.49,53.82 21.29,53.82 arc45 20.84,53.64 16.13,48.93 arc-45 15.68,48.74 11.11,48.74 arc45 10.66,48.56 9.61,47.51 arc-45 9.16,47.33 PCIE-NORTH.A13
  Bottom 0.152: ZED1.87 v46.16,54.23
BANK13_01_N  (via drill 0.25)
  Top 0.152: v45.36,47.37 45.5,47.51 arc45 45.61,47.78 45.61,48.25 arc45 45.5,48.52 44.75,49.27 arc45 44.48,49.38 38.45,49.38 arc45 38.18,49.27 36.5,47.58 arc-45 36.23,47.47 31.34,47.47 arc45 31.07,47.36 29.47,45.77 arc45 29.36,45.5 29.36,38.32 arc45 29.47,38.05 31.4,36.13 arc-45 31.59,35.68 31.59,29.84 arc-90 30.41,28.67 29.01,28.67 arc45 28.92,28.63 28.9,28.61 arc-45 28.81,28.57 U9.38
  Bottom 0.152: ZED1.90 v45.36,47.37
BANK13_01_P  (via drill 0.25)
  Top 0.152: v46.16,47.37 46.02,47.51 arc-45 45.91,47.78 45.91,48.38 arc45 45.8,48.65 44.88,49.57 arc45 44.61,49.68 38.32,49.68 arc45 38.05,49.57 36.37,47.89 arc-45 36.1,47.78 31.21,47.78 arc45 30.94,47.67 29.17,45.89 arc45 29.06,45.62 29.06,38.2 arc45 29.17,37.92 31.09,36 arc-45 31.28,35.55 31.28,29.84 arc-90 30.41,28.98 29.01,28.98 arc-45 28.92,29.02 28.9,29.04 arc45 28.81,29.07 U9.39
  Bottom 0.152: ZED1.88 v46.16,47.37
BANK13_02_N  (via drill 0.25)
  Top 0.152: v43.76,54.23 arc-45 43.83,54.4 43.93,54.5 arc45 44.01,54.68 44.01,54.71 arc90 43.63,55.09 20.65,55.09 arc45 20.2,54.91 15.5,50.2 arc-45 15.05,50.01 12.24,50.01 arc90 12.11,49.88 12.11,49.88 arc-90 11.96,49.75 11.92,49.75 arc-90 11.79,49.88 11.79,49.88 arc85 11.64,50.01 10.88,50.01 arc85 10.75,49.91 arc-90 10.61,49.8 10.6,49.8 arc-100 10.43,49.96 arc80 10.35,50.13 arc80 10.12,50.1 9.96,49.94 arc-90 9.74,49.94 9.74,49.94 arc-90 9.74,50.15 9.9,50.32 arc90 9.9,50.53 9.9,50.53 arc90 9.69,50.53 9.52,50.37 arc-90 9.31,50.37 9.31,50.37 arc-90 9.31,50.59 9.47,50.75 arc135 9.35,50.97 9.23,50.97 arc45 8.79,50.78 PCIE-NORTH.A16
  Bottom 0.152: ZED1.93 v43.76,54.23
BANK13_02_P  (via drill 0.25)
  Top 0.152: v44.56,54.23 arc45 44.49,54.4 44.39,54.5 arc-45 44.31,54.68 44.31,54.76 arc90 43.68,55.4 20.53,55.4 arc45 20.08,55.21 15.37,50.5 arc-45 14.92,50.32 10.81,50.32 arc-45 10.37,50.5 9.73,51.14 arc45 9.28,51.33 PCIE-NORTH.A17
  Bottom 0.152: ZED1.91 v44.56,54.23
BANK13_03_N
  Bottom 0.152: ZED1.94 43.76,47.71 arc45 43.83,47.53 43.93,47.43 arc-45 44,47.25 44,46.15 arc-90 43.72,45.87 41.31,45.87 arc-45 40.86,46.06 38.15,48.77 arc-45 37.97,49.22 37.97,49.71 arc45 37.78,50.16 37.52,50.42 arc-45 37.33,50.87 37.33,52.5 arc45 37.14,52.95 34.89,55.21 arc45 34.44,55.4 20.53,55.4 arc45 20.08,55.21 15.37,50.5 arc-45 14.92,50.32 13.03,50.32 arc-45 12.58,50.5 9.54,53.54 arc45 9.09,53.73 7.16,53.73 arc45 6.71,53.54 5.81,52.64 arc-45 5.36,52.46 3.8,52.46 arc45 3.36,52.27 2.02,50.93 arc45 1.83,50.48 PCIE-NORTH.B16
BANK13_03_P
  Bottom 0.152: ZED1.92 44.56,47.71 arc-45 44.49,47.53 44.38,47.43 arc45 44.31,47.25 44.31,46.15 arc-90 43.72,45.57 41.19,45.57 arc-45 40.74,45.75 37.85,48.65 arc-45 37.66,49.09 37.66,49.59 arc45 37.47,50.03 37.21,50.3 arc-45 37.03,50.75 37.03,52.38 arc45 36.84,52.83 34.76,54.91 arc45 34.31,55.09 20.65,55.09 arc45 20.2,54.91 15.5,50.2 arc-45 15.05,50.01 12.9,50.01 arc-45 12.45,50.2 11.95,50.7 arc90 11.74,50.7 11.73,50.69 arc-90 11.51,50.69 11.48,50.72 arc-90 11.48,50.93 11.49,50.94 arc90 11.49,51.16 11.15,51.5 arc90 10.94,51.5 10.93,51.49 arc-90 10.71,51.49 10.68,51.52 arc-90 10.68,51.73 10.69,51.75 arc90 10.69,51.96 10.66,51.99 arc90 10.44,51.99 10.43,51.98 arc-90 10.21,51.98 10.18,52.01 arc-90 10.18,52.23 10.19,52.24 arc90 10.19,52.46 9.88,52.77 arc90 9.66,52.77 9.65,52.76 arc-90 9.44,52.76 9.41,52.79 arc-90 9.41,53 9.42,53.02 arc90 9.42,53.23 9.41,53.24 arc45 8.96,53.42 7.86,53.42 arc90 7.71,53.27 7.71,53.23 arc-90 7.56,53.08 7.46,53.08 arc-90 7.31,53.23 7.31,53.25 arc90 7.16,53.4 arc45 6.88,53.26 arc80 6.84,53.02 6.85,53.01 arc-90 6.85,52.79 6.79,52.73 arc-90 6.57,52.73 6.56,52.75 arc90 6.35,52.75 6.03,52.43 | 6.03,52.43 5.94,52.34 arc-45 5.49,52.15 4.92,52.15 arc45 4.47,51.97 PCIE-NORTH.B17 | 6.03,52.43 arc-63 6.03,52.43
BANK13_04_N
  Bottom 0.152: PCIE-SOUTH.A6 arc90 9,9.16 arc-20 9.43,9.11 arc45 9.7,9.2 arc-90 9.91,9.2 9.95,9.16 arc-90 9.95,8.95 9.92,8.93 arc90 9.92,8.71 9.95,8.68 arc90 10.17,8.68 10.19,8.7 arc-90 10.41,8.7 10.44,8.67 arc-90 10.44,8.45 10.42,8.43 arc90 10.42,8.21 10.45,8.18 arc90 10.66,8.18 10.69,8.21 arc-90 10.9,8.21 10.94,8.17 arc-90 10.94,7.93 arc-45 10.94,7.93 10.92,7.92 arc90 10.92,7.71 11.29,7.34 arc90 11.5,7.34 11.53,7.37 11.55,7.4 arc-70 11.7,7.56 11.75,7.56 arc-90 11.9,7.4 11.9,7.29 arc90 12.06,7.14 12.1,7.14 arc90 12.26,7.29 12.26,7.33 arc-90 12.41,7.48 12.45,7.48 arc-90 12.61,7.33 12.61,7.29 arc90 12.76,7.14 15.04,7.14 arc-45 15.49,6.95 20.2,2.24 arc45 20.65,2.06 36.19,2.06 arc45 36.64,2.24 40.68,6.29 arc-45 41.13,6.48 42.95,6.48 arc90 43.21,6.73 arc45 43.11,6.98 43.07,7.01 arc-45 42.96,7.28 ZED1.195
BANK13_04_P
  Bottom 0.152: PCIE-SOUTH.A5 9.11,8.82 arc-45 9.56,8.64 11.18,7.02 arc45 11.63,6.83 14.91,6.83 arc-45 15.36,6.65 20.07,1.94 arc45 20.52,1.75 36.31,1.75 arc45 36.76,1.94 40.81,5.99 arc-45 41.26,6.17 43,6.17 arc90 43.51,6.68 43.51,6.72 arc-45 43.62,6.99 43.65,7.01 arc45 43.76,7.28 ZED1.193
BANK13_05_N  (via drill 0.25)
  Top 0.152: v42.96,2.92 arc45 43.03,2.75 43.13,2.65 arc-45 43.21,2.47 43.21,2.44 arc-90 42.83,2.06 20.65,2.06 arc-45 20.2,2.24 15.49,6.95 arc45 15.04,7.14 9.16,7.14 arc45 8.71,6.95 arc-45 8.4,6.82 PCIE-SOUTH.A3
  Bottom 0.152: ZED1.196 v42.96,2.92
BANK13_05_P  (via drill 0.25)
  Top 0.152: v43.76,2.92 arc-45 43.69,2.75 43.59,2.65 arc45 43.51,2.47 43.51,2.39 arc-90 42.88,1.75 20.52,1.75 arc-45 20.07,1.94 15.36,6.65 arc45 14.91,6.83 11.9,6.83 arc90 11.74,6.68 11.74,6.68 arc-90 11.59,6.52 11.51,6.52 arc-90 11.36,6.68 11.36,6.68 arc90 11.2,6.83 11.12,6.83 arc90 10.97,6.68 10.97,6.68 arc-90 10.82,6.52 10.74,6.52 arc-90 10.59,6.68 10.59,6.68 arc90 10.43,6.83 10.35,6.83 arc90 10.2,6.68 10.2,6.68 arc-90 10.05,6.52 9.97,6.52 arc-90 9.81,6.68 9.81,6.68 arc90 9.66,6.83 9.29,6.83 arc45 8.89,6.67 8.52,6.29 arc45 8.33,5.84 PCIE-SOUTH.A2
  Bottom 0.152: ZED1.194 v43.76,2.92
BANK13_06_N
  Bottom 0.152: ZED1.199 41.36,9.44 arc-45 41.43,9.62 41.53,9.72 arc45 41.6,9.9 41.6,10.36 arc90 41.32,10.64 40.04,10.64 arc45 39.59,10.46 38.15,9.01 arc45 37.97,8.56 37.97,7.44 arc-45 37.78,6.99 37.52,6.73 arc45 37.33,6.28 37.33,4.64 arc-45 37.14,4.2 36.16,3.21 arc-45 35.71,3.02 21.16,3.02 arc-45 20.71,3.21 16,7.92 arc45 15.55,8.1 12.27,8.1 arc-45 11.82,8.29 10.83,9.28 arc-30 10.64,9.57 arc60 10.49,9.72 10.34,9.72 arc-90 10.18,9.88 10.18,9.89 arc-90 10.34,10.04 10.49,10.04 arc90 10.64,10.2 10.64,10.21 arc90 10.49,10.36 10.34,10.36 arc-90 10.18,10.52 10.18,10.53 arc-90 10.34,10.69 10.49,10.69 arc90 10.64,10.84 10.64,10.85 arc90 10.49,11 10.34,11 arc-90 10.18,11.15 10.18,11.17 arc-90 10.34,11.32 10.49,11.32 arc90 10.64,11.47 arc45 10.49,11.83 9.98,12.35 arc45 9.62,12.5 8.58,12.5 arc90 8.33,12.25 PCIE-SOUTH.A8
BANK13_06_P
  Bottom 0.152: ZED1.197 42.16,9.44 arc45 42.09,9.62 41.98,9.72 arc-45 41.91,9.9 41.91,10.36 arc90 41.32,10.95 39.92,10.95 arc45 39.47,10.76 37.85,9.14 arc45 37.66,8.69 37.66,7.56 arc-45 37.47,7.12 37.21,6.85 arc45 37.03,6.4 37.03,4.77 arc-45 36.84,4.32 36.03,3.51 arc-45 35.58,3.33 21.28,3.33 arc-45 20.83,3.51 16.12,8.22 arc45 15.68,8.41 12.39,8.41 arc-45 11.94,8.59 11.13,9.4 arc-45 10.95,9.85 10.95,11.55 arc45 10.76,12 10.12,12.64 arc45 9.67,12.82 PCIE-SOUTH.A9
C_CK_E  (via drill 0.25)
  Top 0.152: U5.18 v99.06,34.58
  Bottom 0.152: U$14.1 86.49,28.57 arc90 87,29.08 87,31.31 arc-90 87.76,32.07 96.7,32.07 arc45 97.15,32.25 98.87,33.98 arc45 99.06,34.43
  Bottom 0.203: 99.06,34.43 v99.06,34.58
C_CK_W  (via drill 0.25)
  Top 0.152: U9.18 v22.86,22.57
  Bottom 0.152: U$1.1 35.43,28.57 arc90 34.92,28.07 34.92,25.84 arc-90 34.16,25.08 25.22,25.08 arc45 24.77,24.9 23.05,23.17 arc45 22.86,22.72
  Bottom 0.203: 22.86,22.72 v22.86,22.57
C_EN_E  (via drill 0.25)
  Top 0.152: U5.14 v101.06,34.58
  Route15 0.152: U$3.1 74.29,31.11 arc-45 74.73,30.93 76.6,29.07 arc45 77.05,28.88 86.81,28.88 arc-45 87.26,28.69 v87.63,28.32
  Bottom 0.152: v87.63,28.32 87.63,31.18 arc-90 87.88,31.43 97.34,31.43 arc45 97.78,31.62 100.56,34.39 arc-45 101,34.58 v101.06,34.58
C_EN_W  (via drill 0.25)
  Top 0.152: U9.14 v20.86,22.57
  Route15 0.152: U$4.1 47.63,26.04 arc-45 47.19,26.22 45.32,28.08 arc45 44.87,28.27 35.11,28.27 arc-45 34.66,28.46 v34.29,28.83
  Bottom 0.152: v34.29,28.83 34.29,25.97 arc-90 34.04,25.72 24.58,25.72 arc45 24.13,25.53 21.36,22.76 arc-45 20.91,22.57 v20.86,22.57
C_SI_E  (via drill 0.25)
  Top 0.152: U5.19 v98.56,35.02
  Bottom 0.152: 98.56,34.56 v98.56,35.02 98.56,34.56 | U$15.1 75.56,29.84 arc-45 76,29.66 76.6,29.07 arc45 77.05,28.88 86.42,28.88 arc90 86.68,29.13 86.68,31.37 arc-90 87.69,32.38 96.38,32.38 arc45 96.83,32.57 98.37,34.11 arc45 98.56,34.56
C_SI_W  (via drill 0.25)
  Top 0.152: U9.19 v23.36,22.12
  Bottom 0.152: U$2.1 46.36,27.3 arc-45 45.91,27.49 45.32,28.08 arc45 44.87,28.27 35.5,28.27 arc90 35.24,28.02 35.24,25.78 arc-90 34.23,24.77 25.54,24.77 arc45 25.09,24.58 23.55,23.04 arc45 23.36,22.59 v23.36,22.12
C_SO_E  (via drill 0.25)
  Top 0.152: U5.15 v100.56,35.02
  Bottom 0.152: U$16.1 75.56,27.3 arc45 76,27.49 76.6,28.08 arc-45 77.05,28.27 86.55,28.27 arc90 87.31,29.03 87.31,31.24 arc-90 87.82,31.75 97.11,31.75 arc45 97.41,31.87 v100.56,35.02
C_SO_W  (via drill 0.25)
  Top 0.152: U9.15 v21.36,22.12
  Bottom 0.152: U$11.1 46.36,29.84 arc45 45.91,29.66 45.32,29.07 arc-45 44.87,28.88 35.37,28.88 arc90 34.61,28.12 34.61,25.91 arc-90 34.1,25.4 24.81,25.4 arc45 24.51,25.28 v21.36,22.12
CSO_N_V  (via drill 0.25, 0.25 pad 0.25)
  Top 0.406: v66.67,38.1 C10.1 | v68.58,36.2 arc-63 v68.58,36.2 | v68.58,36.2 68.02,35.63 C9'.1
  Route2 0.152: 62.96,46.12 arc30 62.56,46.18
  Route2 0.203: 62.96,47.03 arc-180 62.96,46.12 arc-180 62.96,47.03 | 62.96,50.34 arc180 62.96,51.26 | 62.96,51.26 arc180 62.96,50.34 | 62.96,54.79 arc180 62.96,55.7 | 62.96,55.7 arc180 62.96,54.79 | 62.96,47.03 62.96,47.13 | 62.96,50.24 62.96,50.34 | 62.96,51.26 62.96,51.36 | 62.96,54.79 62.96,54.69 | 62.96,55.7 62.96,55.8
  Route2 0.406: 62.96,51.36 62.96,54.69 | 62.96,47.13 62.96,50.24 | 62.56,46.18 62.42,46.03 arc45 62.23,45.58 62.23,45.35 arc-45 62.04,44.9 arc90 62.04,44 63.18,42.86 | 63.18,42.86 67.31,38.73 | 67.31,38.73 68.95,37.1 arc-90 68.95,36.56 v68.58,36.2 | 67.31,38.73 v66.67,38.1 | U$19.1 63.18,42.86 | 63.47,56.59 arc90 62.96,56.08 62.96,55.8 | 77.65,56.59 arc-90 78.16,56.08 v78.16,55.88
  Route2 0.61: 77.65,56.59 63.47,56.59
  Bottom 0.406: v66.67,38.1 arc-63 v66.67,38.1 | v66.67,38.1 C10.1 | v68.58,36.2 arc-63 v68.58,36.2 | v68.58,36.2 C9'.1 | ZED1.7 v78.16,55.88
CSO_S_V  (via drill 0.25, 0.25 pad 0.25)
  Top 0.406: v55.25,19.05 C12.1 | v53.34,20.95 C11'.1
  Route2 0.203: 60.56,1.35 60.56,1.45 | 60.56,1.45 arc180 60.56,2.36 | 60.56,2.36 60.56,2.46 | 60.56,2.36 arc180 60.56,1.45 | 60.56,5.89 arc180 60.56,6.81 | 60.56,6.81 arc180 60.56,5.89 | 60.56,10.12 arc180 60.56,11.03 | 60.56,11.03 arc180 60.56,10.12 | 60.56,5.79 60.56,5.89 | 60.56,6.81 60.56,6.91 | 60.56,10.01 60.56,10.12 | 60.56,11.03 60.56,11.14
  Route2 0.406: 60.56,2.46 60.56,5.79 | 60.56,6.91 60.56,10.01 | 60.56,11.14 60.56,12.19 arc44 60.38,12.63 59.87,13.15 arc45 59.87,13.16 58.74,14.29 | 58.74,14.29 54.61,18.41 | 54.61,18.41 52.97,20.05 arc-90 52.97,20.59 v53.34,20.95 | 54.61,18.41 v55.25,19.05 | U$22.1 58.74,14.29 | 60.56,1.35 60.56,0.94 arc90 60.94,0.56 61.11,0.56 | 76.05,0.56 76.18,0.56 arc90 76.56,0.94 v76.56,1.27
  Route2 0.61: 76.05,0.56 61.11,0.56
  Bottom 0.406: v53.34,20.95 53.85,21.46 C11'.1 | v55.25,19.05 55.88,19.68 C12.1 | ZED1.112 v76.56,1.27
DONE_E  (via drill 0.25)
  Top 0.203: v101.31,25.12 arc45 101.38,24.95 102.64,23.68 arc45 103.09,23.49 106.78,23.49 arc-45 107.23,23.31 107.77,22.76 arc45 108.22,22.57 U5.76
  Bottom 0.203: v101.31,25.12 U4.22
DONE_W  (via drill 0.25)
  Top 0.203: v20.61,32.03 arc45 20.54,32.2 19.28,33.47 arc45 18.83,33.66 15.14,33.66 arc-45 14.69,33.84 14.15,34.39 arc45 13.7,34.58 U9.76
  Bottom 0.203: v20.61,32.03 U3.22
E_EN  (via drill 0.25)
  Top 0.203: X-EAST.14 80.89,39.33 | 80.89,39.33 arc45 81.34,39.51 | 81.34,39.51 v81.91,40.07 | 80.89,39.33 arc45 81.34,39.51 | v91.44,41.91 91.94,41.91 arc-45 92.39,41.72 92.65,41.46 arc45 93.1,41.27 96.42,41.27 arc-90 97.56,40.13 97.56,38.92 arc45 97.75,38.47 97.87,38.34 arc-45 98.06,37.89 U5.20
  Bottom 0.203: v81.91,40.07 82.48,40.07 arc45 82.93,40.25 83.38,40.71 arc-45 83.83,40.89 84.82,40.89 arc45 85.27,41.08 85.28,41.09 arc-45 85.72,41.27 89.78,41.27 arc45 90.23,41.46 90.49,41.72 arc-45 90.94,41.91 v91.44,41.91
E_I2C_V  (via drill 0.25)
  Top 0.203: X-EAST.11 84.84,39.83 | X-EAST.13 84.71,39.33 | 84.84,39.83 84.84,39.4 84.71,39.53 v84.71,39.58 | 84.71,39.33 v84.71,39.58 | v84.71,39.58 84.71,39.83 | 84.71,39.33 84.58,39.33 84.58,39.83 84.71,39.83 | 84.71,39.83 84.84,39.83
  Route2 0.508: v84.71,39.58 arc45 85.14,39.75 85.49,40.1 arc45 85.67,40.55 85.67,44.14 arc-45 85.86,44.59 89.35,48.07 arc45 89.53,48.52 89.53,50.54 arc-45 89.72,50.99 PWR-NE.1
E_SCK  (via drill 0.25)  (1 unrouted)
  Top 0.203: X-EAST.12 79.38,39.83 | 79.38,39.83 arc-45 78.94,40.01 | 79.38,39.83 arc-45 78.94,40.01 | 78.94,40.01 v78.87,40.08 | v97.56,35.02 U5.21
  Route2 0.203: v90.81,42.55 91.3,42.55 arc-45 91.75,42.36 92.65,41.46 arc45 93.1,41.27 96.42,41.27 arc-90 97.56,40.13 97.56,38.92 arc45 97.75,38.47 97.87,38.34 arc-45 98.06,37.89 98.06,36.53 arc-45 97.95,36.26 97.67,35.99 arc45 97.56,35.72 v97.56,35.02
  Bottom 0.203: 79.18,40.39 arc-45 79.63,40.58 | v78.87,40.08 79.18,40.39 | 79.18,40.39 arc-45 79.63,40.58 | 82.22,40.58 arc45 82.67,40.76 83.13,41.22 arc-45 83.58,41.4 83.66,41.4 arc45 83.93,41.51 84.34,41.92 arc-45 84.61,42.04 84.81,42.04 arc-45 85.08,41.92 85.11,41.89 arc45 85.38,41.78 89.53,41.78 arc45 89.97,41.97 90.44,42.43 arc-45 90.71,42.55 v90.81,42.55 90.79,42.53 | 79.63,40.58 82.35,40.58
E_SCL
  Top 0.203: 87.5,38.83 X-EAST.15 87.76,38.83 arc-90 88.9,37.68 88.9,32.01 arc45 89.09,31.56 90.89,29.76 arc45 91.34,29.57 U5.36
E_SDA
  Top 0.203: 87.28,38.33 X-EAST.17 87.63,38.33 arc-90 88.27,37.69 88.27,31.89 arc45 88.45,31.44 90.63,29.26 arc45 91.08,29.07 U5.37
E_SDI  (via drill 0.25)
  Top 0.203: X-EAST.16 81.14,38.83 arc45 81.59,39.01 v81.91,39.33 | v90.81,41.27 91.69,41.27 arc-45 92.13,41.09 92.4,40.83 arc45 92.85,40.64 95.43,40.64 arc-90 96.06,40 U5.24
  Bottom 0.203: v81.91,39.33 81.97,39.39 arc-45 82.42,39.58 83.64,39.58 arc45 84.08,39.76 84.27,39.95 arc-45 84.72,40.13 89.4,40.13 arc45 89.85,40.32 v90.81,41.27
E_SDO  (via drill 0.25)
  Top 0.203: X-EAST.18 81.4,38.33 | 81.4,38.33 arc45 81.85,38.51 | 81.85,38.51 v81.91,38.58 | 81.4,38.33 arc45 81.85,38.51 | v95.56,35.02 U5.25
  Route2 0.203: v91.44,40.64 95.43,40.64 arc-90 96.06,40 96.06,36.53 arc-45 95.95,36.26 95.67,35.99 arc45 95.56,35.72 v95.56,35.02
  Bottom 0.203: 85.28,39.44 85.11,39.26 arc-45 84.66,39.08 82.67,39.08 arc45 82.22,38.89 v81.91,38.58 | 85.28,39.44 arc-45 85.73,39.62 | 85.73,39.62 90.16,39.62 arc45 90.61,39.81 v91.44,40.64 | 85.28,39.44 arc-45 85.73,39.62
E_SPI_V  (via drill 0.25)
  Top 0.152: 84.71,37.33 84.84,37.33 84.84,37.47
  Top 0.203: X-EAST.19 84.84,37.83 84.84,38.55 84.71,38.55 | X-EAST.21 84.71,37.33 | 84.84,37.4 84.84,37.47 84.84,38.1 | 84.71,37.33 84.71,38.55 | 84.71,37.33 84.58,37.33 84.58,38.55 84.71,38.55 | 84.71,38.55 84.71,38.54 v84.71,38.42
  Route2 0.508: v84.71,38.42 85.14,38.42 arc45 85.59,38.6 85.72,38.73 86.5,39.56 arc43 86.68,40 86.68,43.55 arc-45 86.86,44 90.3,47.44 arc-45 90.75,47.62 91.18,47.62 arc45 91.63,47.81 91.89,48.07 arc45 92.08,48.52 92.08,50.54 arc-45 92.26,50.99 PWR-NE.3
E_VE_CV  (via drill 0.25)
  Top 0.152: X-EAST.90 v81.46,17.32
  Bottom 0.152: PB-SE.19 84.75,16.85 84.33,17.27 81.51,17.27 v81.46,17.32
E_VE_OV  (via drill 0.25)
  Top 0.152: X-EAST.93 87.69,15.32 arc-45 87.87,15.25 89.19,13.93 arc45 89.37,13.85 v91.69,13.85
  Bottom 0.152: PB-SE.8 v91.69,13.85
E_VE_UV  (via drill 0.25)
  Top 0.152: X-EAST.91 87.83,15.82 arc-45 88.01,15.75 89.33,14.43 arc45 89.51,14.35 v91.31,14.35
  Bottom 0.152: PB-SE.10 v91.31,14.35
GND  (via drill 0.25, 2.15 pad 2.3, 3.17 pad 4.5)  (2 unrouted)